# EAGLE board PAINEL (EAGLE 6.3), part 1 of 4
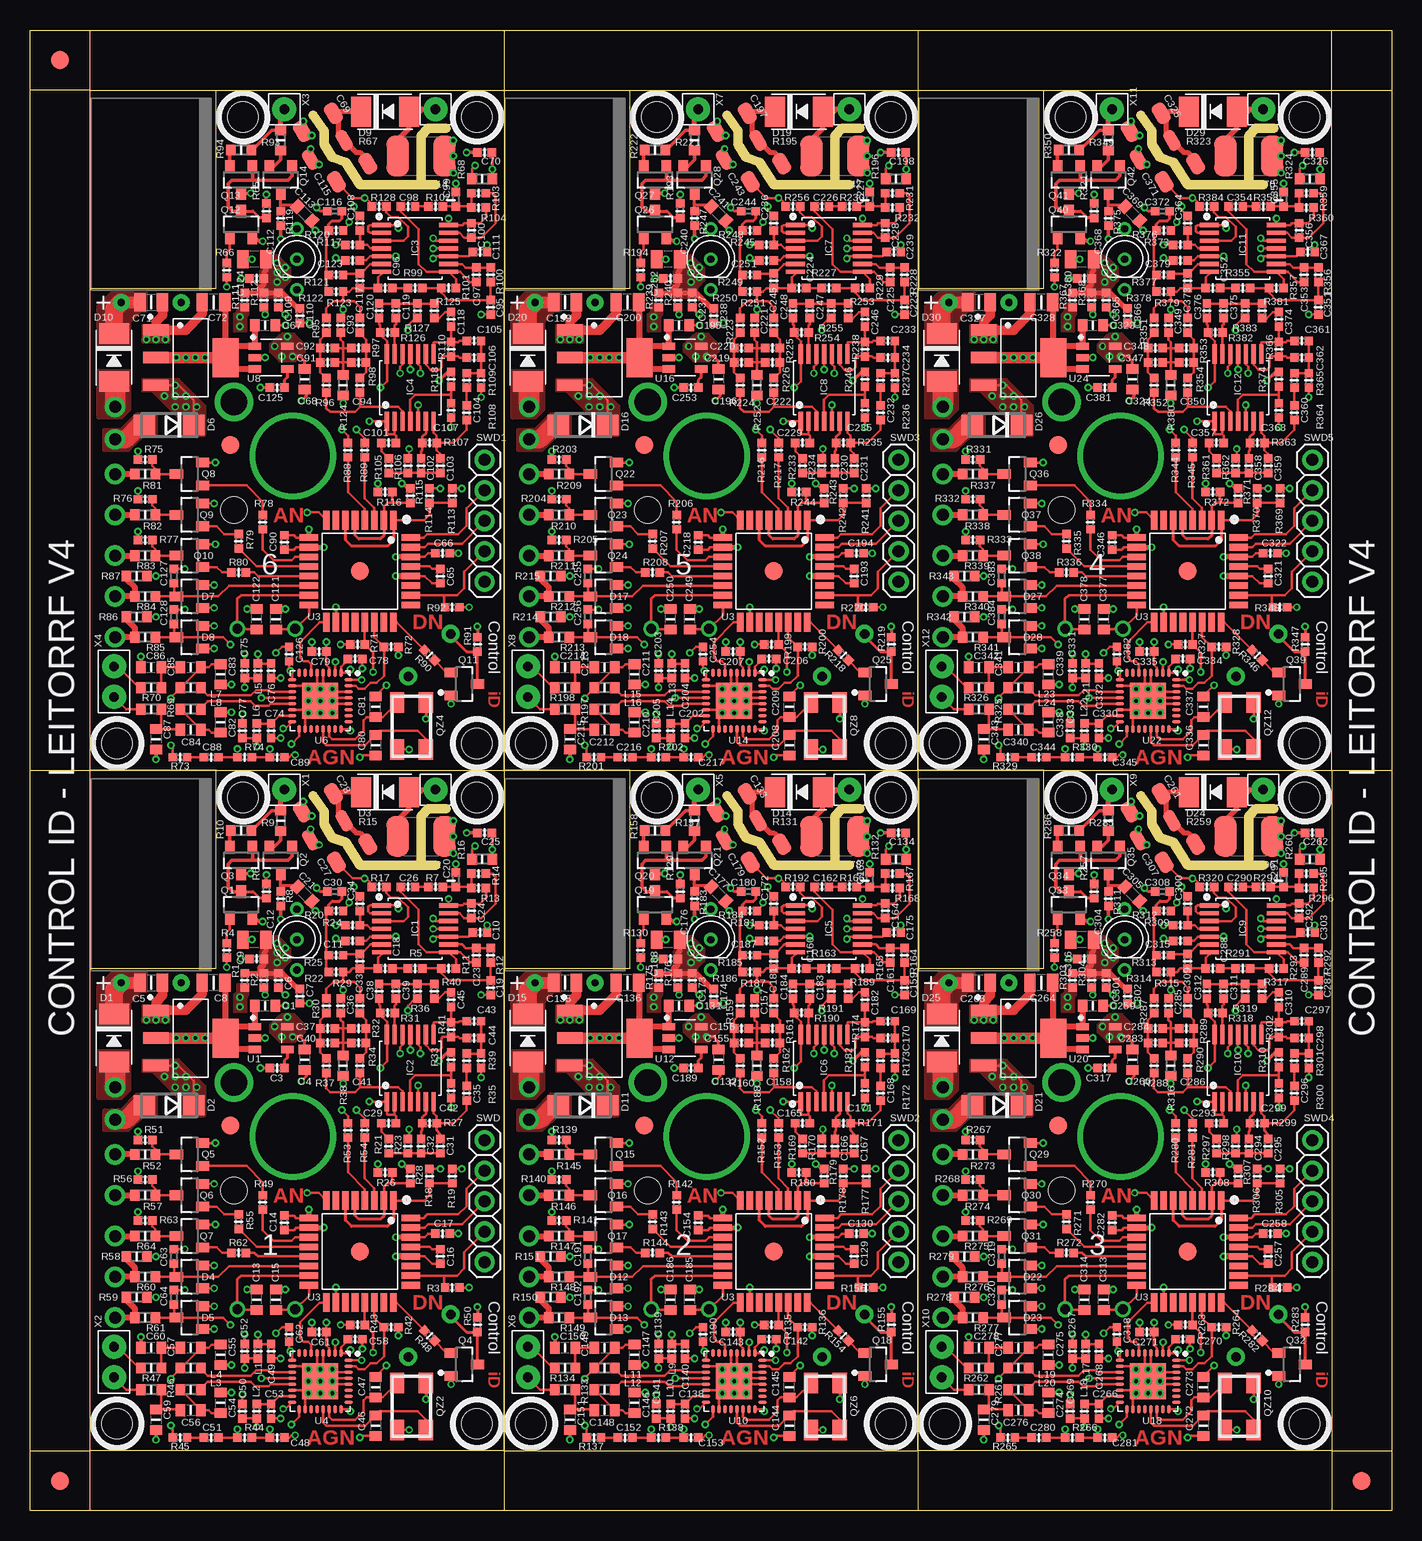
[diagram p0: board, top side]
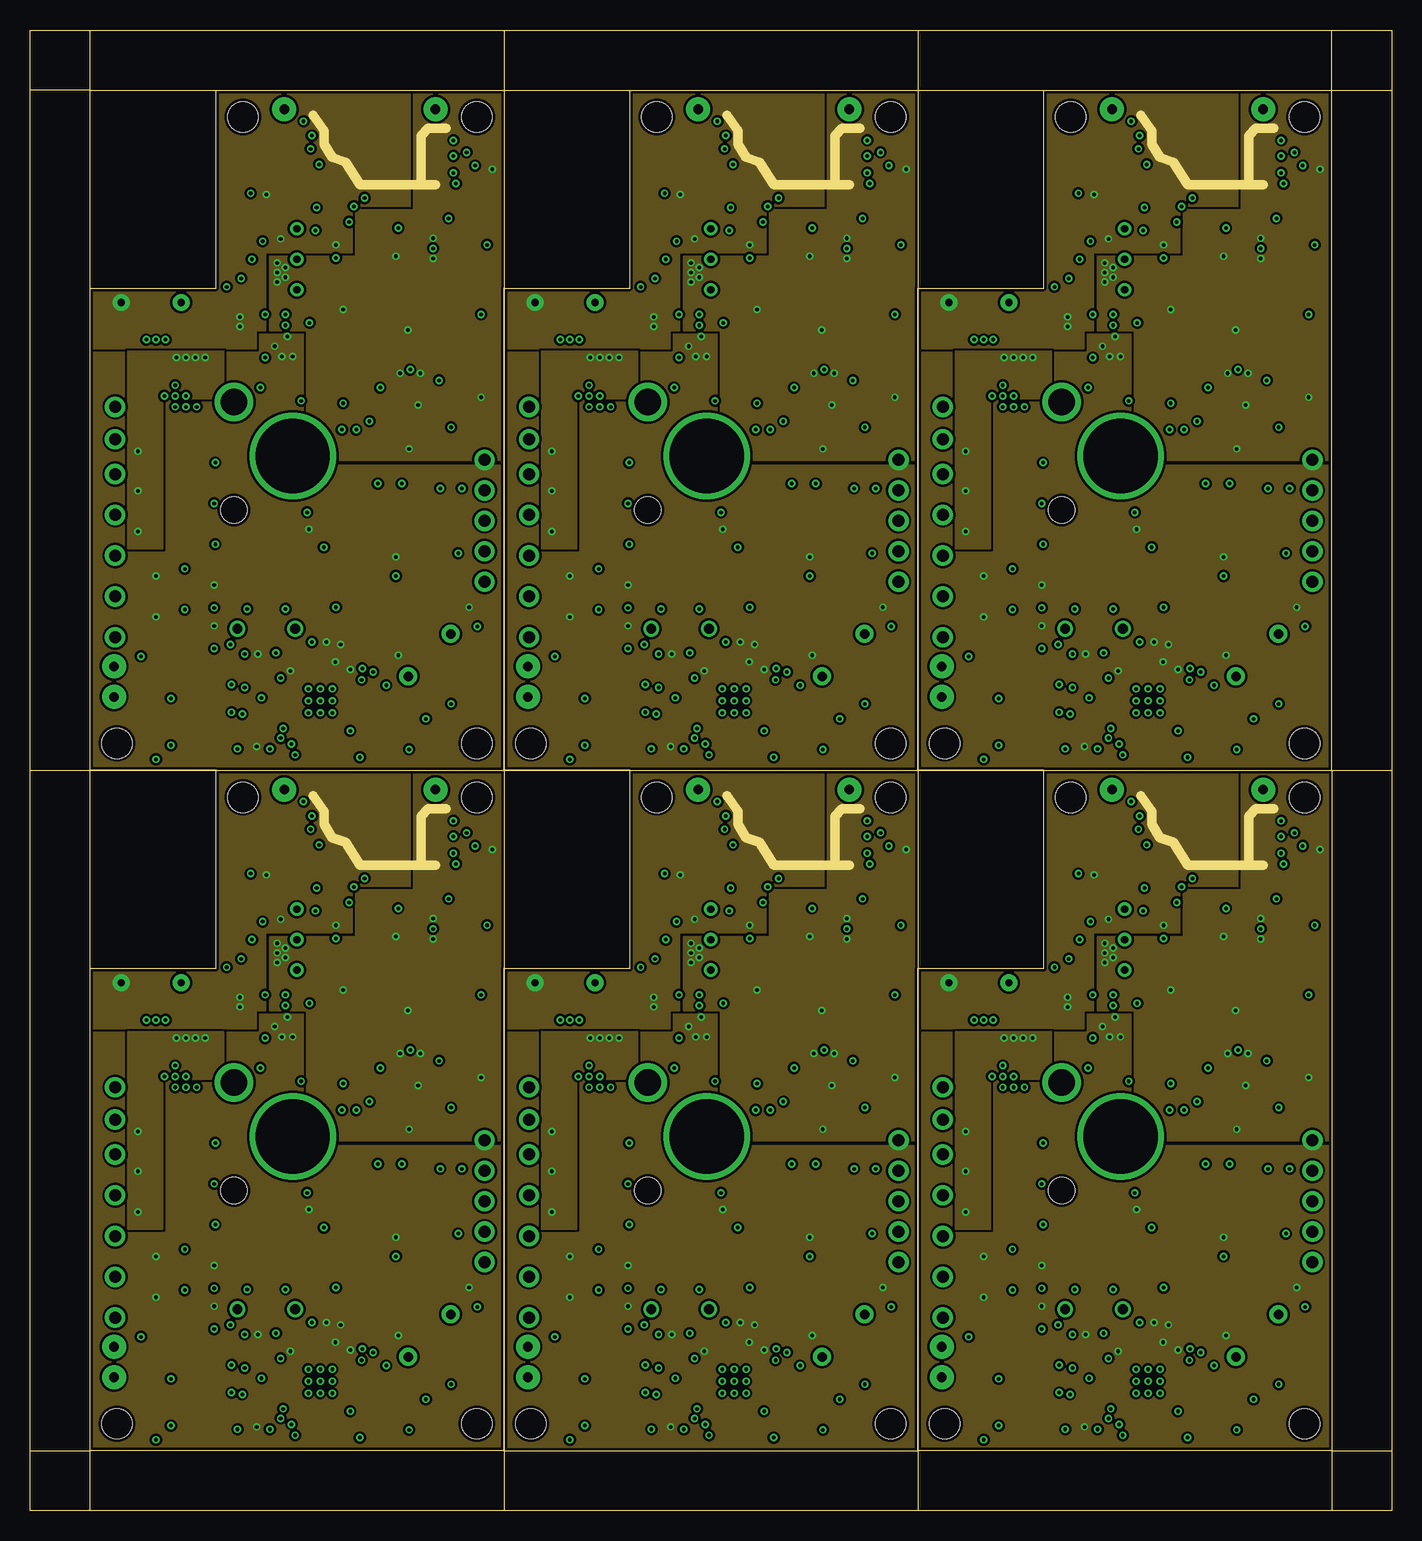
[diagram p1: board, inner layer Route4]
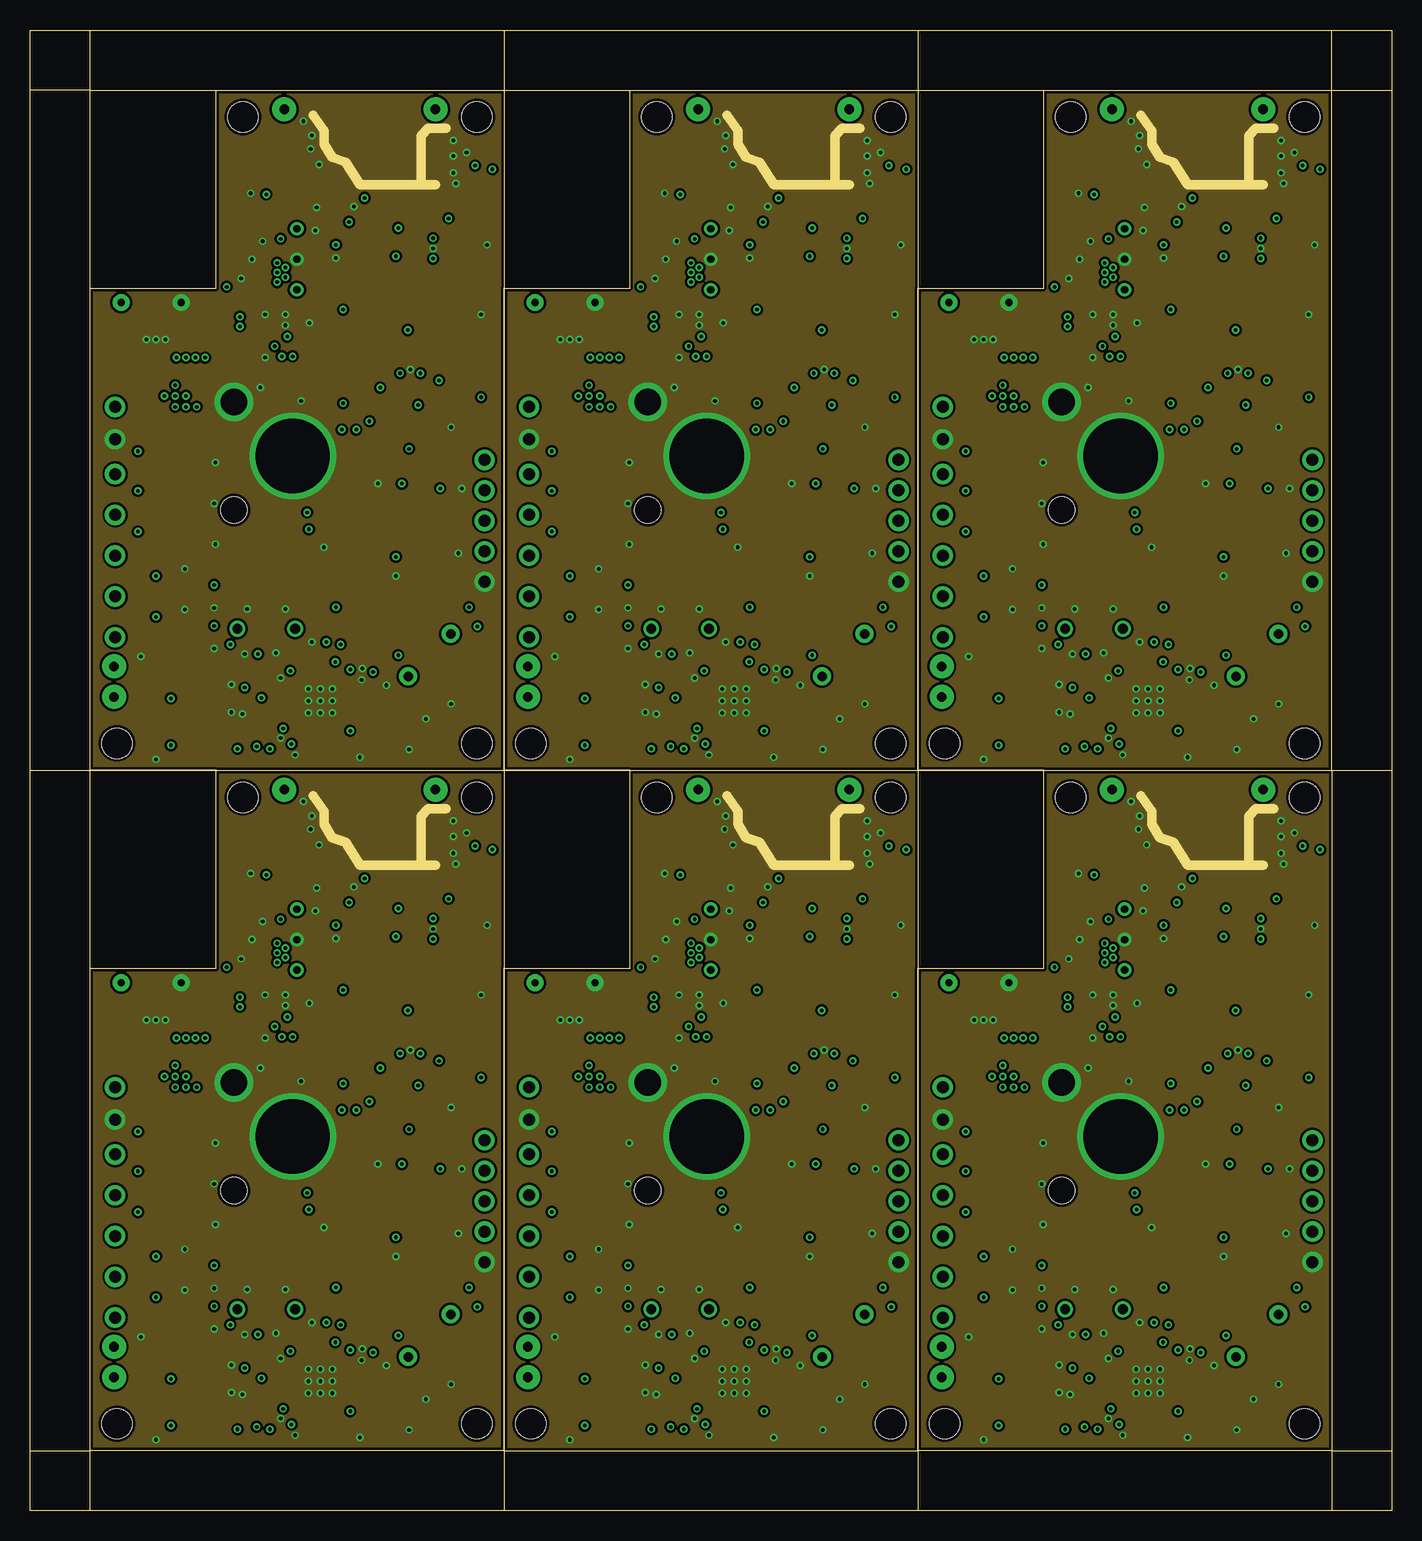
[diagram p2: board, inner layer Route5]
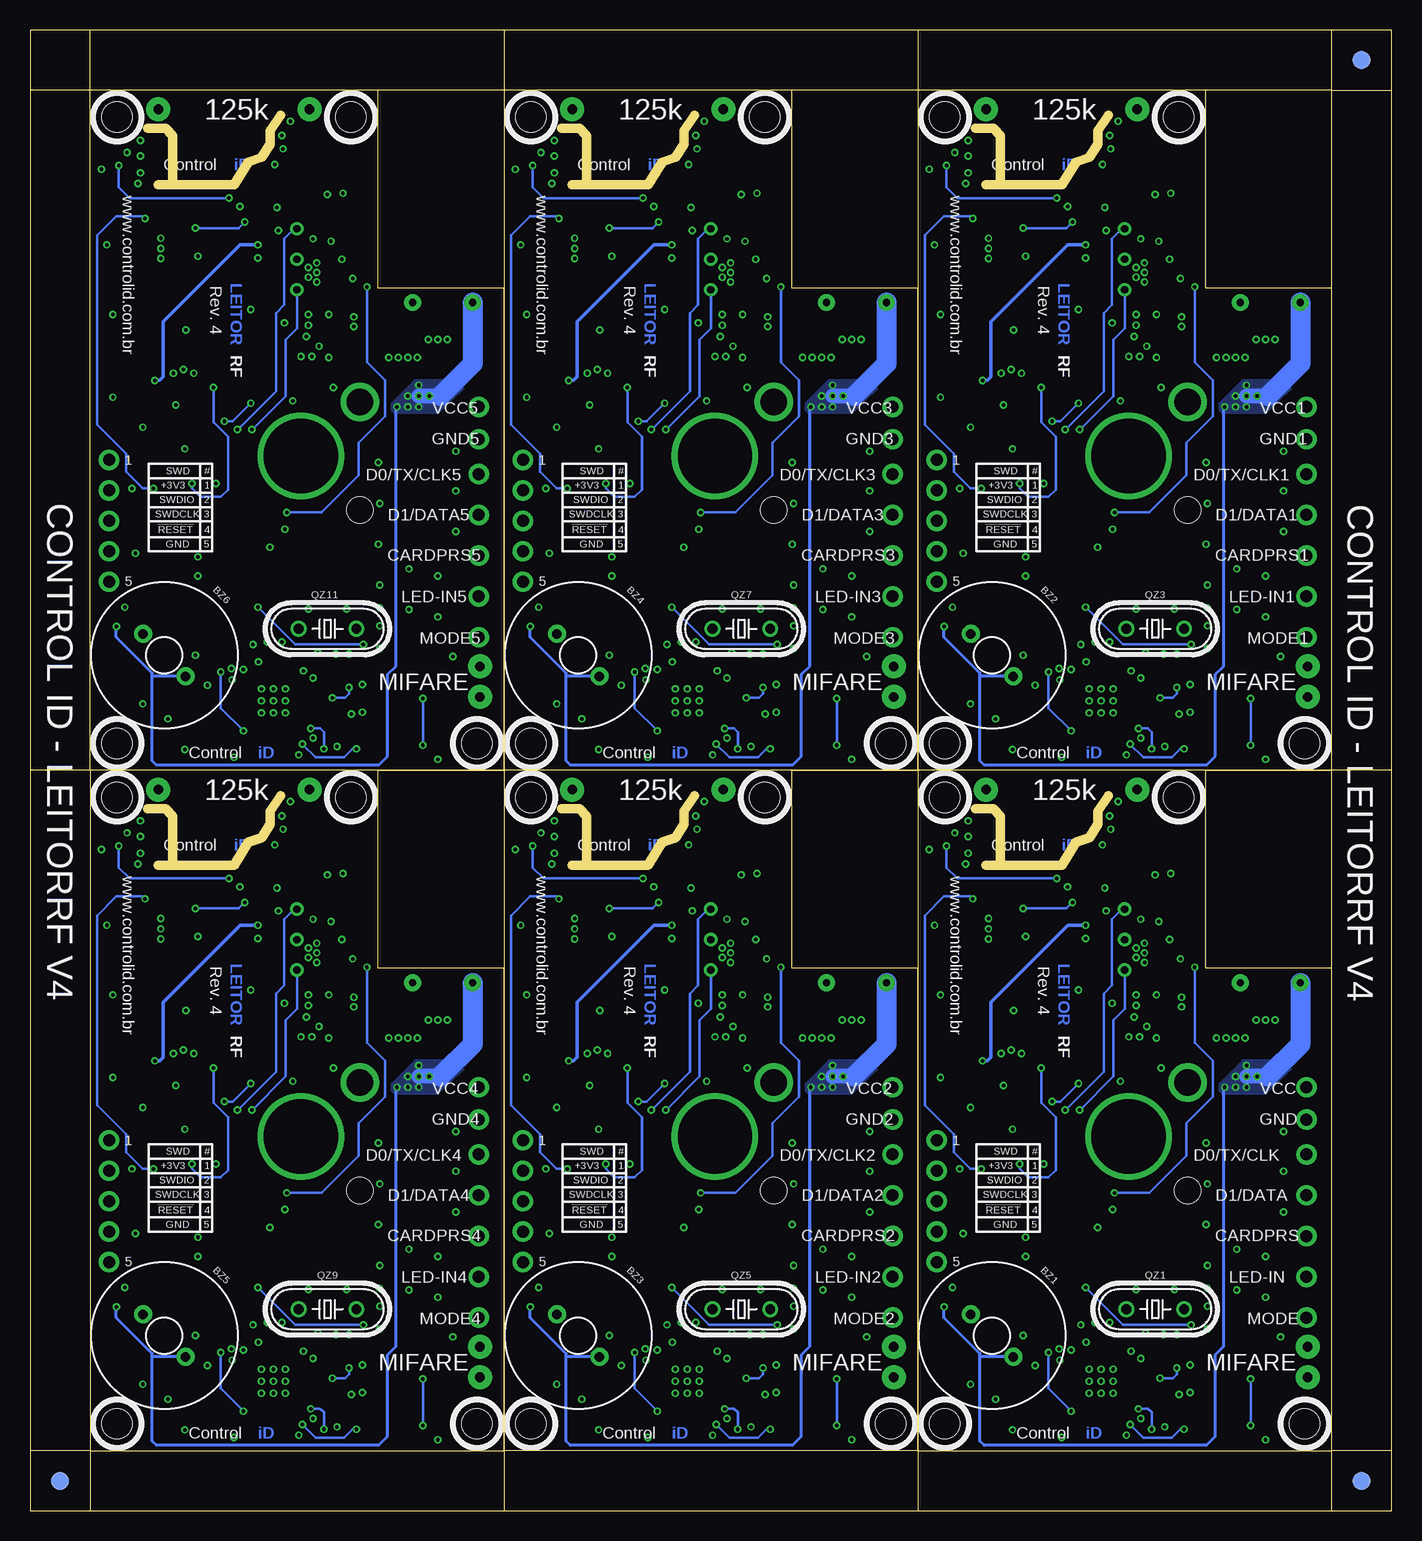
[diagram p3: board, bottom side, seen from below]

Size 113.5 x 123.4 mm. Coordinates in mm from the lower left corner, seen from the top.
Outline: 15.5,61.7 39.5,61.7
Outline: 39.5,61.7 39.5,45.2
Outline: 39.5,5 5,5
Outline: 5,5 5,45.2
Outline: 5,45.2 15.5,45.2 15.5,61.7
Outline: 39.5,101.9 39.5,118.4 15.5,118.4 15.5,101.9 5,101.9 5,61.7 15.5,61.7
Outline: 50,61.7 74,61.7
Outline: 74,61.7 74,45.2
Outline: 39.5,5 39.5,45.2
Outline: 39.5,45.2 50,45.2 50,61.7
Outline: 74,101.9 74,118.4 50,118.4 50,101.9 39.5,101.9
Outline: 50,61.7 39.5,61.7
Outline: 39.5,61.7 39.5,101.9
Outline: 84.5,61.7 108.5,61.7
Outline: 108.5,61.7 108.5,5
Outline: 108.5,5 74,5
Outline: 74,5 74,45.2
Outline: 74,45.2 84.5,45.2 84.5,61.7
Outline: 84.5,118.4 108.5,118.4
Outline: 84.5,61.7 74,61.7
Outline: 74,61.7 74,101.9
Outline: 74,101.9 84.5,101.9 84.5,118.4
Outline: 0,5 0,0 5,0
Outline: 0,5 0,61.7
Outline: 0,61.7 0,118.4
Outline: 0,118.4 0,123.4 5,123.4
Outline: 5,123.4 39.5,123.4
Outline: 39.5,123.4 74,123.4
Outline: 74,123.4 108.5,123.4
Outline: 108.5,123.4 113.5,123.4 113.5,118.4
Outline: 113.5,118.4 113.5,61.7
Outline: 113.5,61.7 113.5,5
Outline: 113.5,5 113.5,0 108.5,0
Outline: 108.5,0 74,0
Outline: 74,0 39.5,0
Outline: 39.5,0 5,0
Outline: 0,5 5,5
Outline: 5,0 5,5
Outline: 5,118.4 0,118.4
Outline: 5,118.4 5,123.4
Outline: 108.5,118.4 108.5,123.4
Outline: 108.5,118.4 113.5,118.4
Outline: 108.5,5 108.5,0
Outline: 108.5,5 113.5,5
Outline: 39.5,123.4 39.5,0
Outline: 74,123.4 74,0
Outline: 0,61.7 113.5,61.7
Outline: 5,45.2 5,118.4
Outline: 39.5,5 74,5
Outline: 108.5,61.7 108.5,118.4
Outline: 5,118.4 84.5,118.4
Copper layers (1+4*5+16): Top 0.035mm / dielectric 0.2mm / Route4 0.035mm / dielectric 1.1mm / Route5 0.035mm / dielectric 0.2mm / Bottom 0.035mm
Design rules "Leitor": minimum track width 8mil, minimum drill 0.3mm, track to track 8mil, track to pad 8mil, pad to pad 8mil, via to via 8mil, smd to smd 0mil, copper to edge 10mil, drill to drill 10mil, minimum pad ring 10mil, minimum via ring 6mil, stop-mask expansion 2mil, vias tented up to drill 100mil, thermal gap 10mil
Holes 2.2 mm at 17,26.7 17,83.4 51.5,26.7 51.5,83.4 86,26.7 86,83.4
Holes 2.5 mm at 7.25,7.25 37.25,7.25 17.75,59.45 37.25,59.45 7.25,63.95 37.25,63.95 17.75,116.15 37.25,116.15 41.75,7.25 71.75,7.25 52.25,59.45 71.75,59.45 41.75,63.95 71.75,63.95 52.25,116.15 71.75,116.15 76.25,7.25 106.25,7.25 86.75,59.45 106.25,59.45 76.25,63.95 106.25,63.95 86.75,116.15 106.25,116.15
bRestrict: area 22.9,58.9 to 23.2,61.5; area 34.9,37.2 to 39.4,37.4; area 22.9,115.6 to 23.2,118.2; area 34.9,93.9 to 39.4,94.1; area 57.4,58.9 to 57.7,61.5; area 69.4,37.2 to 73.9,37.4; area 57.4,115.6 to 57.7,118.2; area 69.4,93.9 to 73.9,94.1; area 91.9,58.9 to 92.2,61.5; area 103.9,37.2 to 108.4,37.4; area 91.9,115.6 to 92.2,118.2; area 103.9,93.9 to 108.4,94.1
Milling: 60 lines

## Footprints (pad centres in the part's own frame; a part is rotated, then mirrored left to right if it is on the bottom)
F/TMB = drill 0.8 pad 1.5: + 2.5,0; - -2.5,0
C0603 = smd 0.8 x 1: 1 -0.85,0; 2 0.85,0
ESK108M016AH2AA = drill 0.6 pad 1.4: + -2.5,0; - 2.5,0
C0402 = smd 0.7 x 0.7: 1 -0.6,0; 2 0.6,0
C0805 = smd 0.95 x 1.5: 1 -0.95,0; 2 0.95,0
C1812S = smd 1.9 x 3.4: 1 -1.95,0; 2 1.95,0
C1206S = smd 1.2 x 1.8: 1 -1.5,0; 2 1.5,0
HOLE = drill 1 pad 1.7: P$1 0,0
SMA = smd 1.7 x 2.5: A 2,0; K -2,0
DO214AC = smd 1.8 x 1.7: A 2.05,0; C -2.05,0
SOT23 = smd 0.8 x 1.1: 1 -0.95,-1.1; 2 0.95,-1.1; 3 0,1.1
FIDUCIAL-1.5X3 = smd 1.5 x 1.5: 1 0,0
TSSOP14 = smd 0.35 x 1.6: 1 -1.95,-2.8; 2 -1.3,-2.8; 3 -0.65,-2.8; 4 0,-2.8; 5 0.65,-2.8; 6 1.3,-2.8; 7 1.95,-2.8; 8 1.95,2.8; 9 1.3,2.8; 10 0.65,2.8; 11 0,2.8; 12 -0.65,2.8; 13 -1.3,2.8; 14 -1.95,2.8
R0402 = smd 0.7 x 0.7: 1 -0.6,0; 2 0.6,0
R0603 = smd 0.8 x 0.9: 1 -0.85,0; 2 0.85,0
LTL1BEKVJNN = drill 0.6: ANODE_GRN -2.54,0; ANODE_RED 2.54,0; COMMON 0,0
HC49/S = drill 0.813: 1 -2.413,0; 2 2.413,0
CRISTAL4SMD = smd 1.7 x 1.2: 1 -1.95,-1.2; 2 1.95,-1.2; 3 1.95,1.2; 4 -1.95,1.2
R1206S = smd 1 x 1.8: 1 -1.6,0; 2 1.6,0
1X05 = drill 1.016 pad 1.7: 1 -5.08,0; 2 -2.54,0; 3 0,0; 4 2.54,0; 5 5.08,0
SOT-23-5 = smd 0.6 x 1.05: 1 -0.95,-1.35; 2 0,-1.35; 3 0.95,-1.35; 4 0.95,1.35; 5 -0.95,1.35
SOT223-3L = smd 0.95 x 2.15: 1 -2.3,-2.9; 2 0,-2.9; 3 2.3,-2.9 | smd 3.25 x 2.15: 4 0,2.9
TQFP32 = smd 0.55 x 1.55: 1 -2.8,-4.25; 2 -2,-4.25; 3 -1.2,-4.25; 4 -0.4,-4.25; 5 0.4,-4.25; 6 1.2,-4.25; 7 2,-4.25; 8 2.8,-4.25; 17 2.8,4.25; 18 2,4.25; 19 1.2,4.25; 20 0.4,4.25; 21 -0.4,4.25; 22 -1.2,4.25; 23 -2,4.25; 24 -2.8,4.25 | smd 1.55 x 0.55: 9 4.25,-2.8; 10 4.25,-2; 11 4.25,-1.2; 12 4.25,-0.4; 13 4.25,0.4; 14 4.25,1.2; 15 4.25,2; 16 4.25,2.8; 25 -4.25,2.8; 26 -4.25,2; 27 -4.25,1.2; 28 -4.25,0.4; 29 -4.25,-0.4; 30 -4.25,-1.2; 31 -4.25,-2; 32 -4.25,-2.8
QFN32 = smd 0.69 x 0.28: 1 -2.35,1.75; 2 -2.35,1.25; 3 -2.35,0.75; 4 -2.35,0.25; 5 -2.35,-0.25; 6 -2.35,-0.75; 7 -2.35,-1.25; 8 -2.35,-1.75; 17 2.35,-1.75; 18 2.35,-1.25; 19 2.35,-0.75; 20 2.35,-0.25; 21 2.35,0.25; 22 2.35,0.75; 23 2.35,1.25; 24 2.35,1.75 | smd 0.28 x 0.69: 9 -1.75,-2.35; 10 -1.25,-2.35; 11 -0.75,-2.35; 12 -0.25,-2.35; 13 0.25,-2.35; 14 0.75,-2.35; 15 1.25,-2.35; 16 1.75,-2.35; 25 1.75,2.35; 26 1.25,2.35; 27 0.75,2.35; 28 0.25,2.35; 29 -0.25,2.35; 30 -0.75,2.35; 31 -1.25,2.35; 32 -1.75,2.35 | smd 3 x 3: 33 0,0
22-23-2021 = drill 0.8 pad 2: 1 -6.3,0; 2 6.3,0
ANTENNA = drill 0.8 pad 2: 1 -1.27,0; 2 1.27,0

## Placement (x,y rotation side)
BZ1  F/TMB  [F/TMB]  33.3,14.6 315 bottom
BZ2  F/TMB  [F/TMB]  33.3,71.3 315 bottom
BZ3  F/TMB  [F/TMB]  67.8,14.6 315 bottom
BZ4  F/TMB  [F/TMB]  67.8,71.3 315 bottom
BZ5  F/TMB  [F/TMB]  102.3,14.6 315 bottom
BZ6  F/TMB  [F/TMB]  102.3,71.3 315 bottom
C1  4.7u  [C0603]  19.6,42.1 0 top
C2  ESK108M016AH2AA  [ESK108M016AH2AA]  10.1,44 0 top
C3  10n  [C0402]  20.6,36.9 180 top
C4  4.7u  [C0603]  22.9,37.6 270 top
C5  10u  [C0805]  10.1,44 0 top
C6  0.1u  [C0402]  20.7,44.2 270 top
C7  10n  [C0402]  22.5,42.9 270 top
C8  10u  [C0805]  15.3,44 180 top
C9  0.1u  [C0402]  18.9,46 180 top
C10  0.1u  [C0402]  37.5,48.2 0 top
C11  0.1u  [C0402]  26.9,47.5 180 top
C12  10u  [C0805]  18.7,47.6 180 top
C13  18p  [C0603]  18.9,17.6 90 top
C14  0.1u  [C0402]  21.2,24 270 top
C15  18p  [C0603]  20.5,17.6 90 top
C16  0.1u  [C0402]  34.2,21.2 270 top
C17  0.1u  [C0402]  34.4,23.1 0 top
C18  220n  [C0402]  29.6,45.2 180 top
C19  4.7n  [C0402]  38.4,43.6 270 top
C20  4.7n  [C0402]  35.5,52.6 90 top
C21  DNP  [C0603]  22.9,51.4 315 top
C22  1n  [C1812S]  32.6,56.2 0 top
C23  68p  [C0402]  37.2,46.3 90 top
C24  68p  [C0402]  36.8,50 90 top
C25  0.1u  [C0402]  37.9,56.5 180 top
C26  220n  [C0402]  31.5,52 0 top
C27  220n  [C1206S]  26.85,54.8 210 top
C28  1n  [C1206S]  24,59 210 top
C29  F:0.1uP:10n  [C0402]  29.9,32.3 0 top
C30  680p  [C0402]  25.4,51.6 180 top
C31  F:220pP:68p  [C0402]  34.2,30.4 270 top
C32  F:1nP:100p  [C0402]  32.6,30.4 270 top
C33  68p  [C0402]  27.5,45.8 90 top
C34  0.1u  [C0402]  27.5,50.6 90 top
C35  F:0.1uP:10n  [C0402]  36.4,34.8 90 top
C36  47p  [C0402]  27.5,42.1 90 top
C37  47p  [C0402]  24.8,40.2 0 top
C38  F:220pP:68p  [C0402]  29.1,43.3 90 top
C39  F:1nP:100p  [C0402]  30.5,43.3 90 top
C40  47p  [C0402]  24.8,39 0 top
C41  47p  [C0402]  27.5,37.1 90 top
C42  0.1u  [C0402]  35.1,35 270 top
C43  F:220pP:68p  [C0402]  37,40.8 0 top
C44  F:1nP:100p  [C0402]  37,39.4 0 top
C45  F:0.1uP:10n  [C0402]  35.1,42.6 270 top
C46  18p  [C0603]  28.8,7.1 270 top
C47  18p  [C0603]  28.8,10.3 90 top
C48  0.1u  [C0402]  20.6,6.1 0 top
C49  100p  [C0402]  20.1,13.3 270 top
C50  100p  [C0402]  17.7,8.3 90 top
C51  1n  [C0402]  15.1,6.1 0 top
C52  0.1u  [C0402]  17.9,13.3 90 top
C53  0.1u  [C0402]  20.1,8.3 270 top
C54  120p  [C0603]  15.9,9 90 top
C55  120p  [C0603]  15.9,13 90 top
C56  18p  [C0603]  13.4,8.4 0 top
C57  18p  [C0603]  13.4,13.6 0 top
C58  0.1u  [C0402]  27.1,14.3 0 top
C59  56p  [C0603]  10.5,7.6 270 top
C60  56p  [C0603]  10.1,13.6 0 top
C61  0.1u  [C0402]  24.1,14.9 180 top
C62  0.1u  [C0402]  21.6,14.7 90 top
C63  0.1u  [C0402]  12,21.2 90 top
C64  0.1u  [C0402]  12,17.8 90 top
C65  0.1u  [C0402]  34.2,77.9 270 top
C66  0.1u  [C0402]  34.4,79.8 0 top
C67  4.7u  [C0603]  19.6,98.8 0 top
C68  4.7u  [C0603]  22.9,94.3 270 top
C69  1n  [C1206S]  24,115.7 210 top
C70  0.1u  [C0402]  37.9,113.2 180 top
C71  10u  [C0805]  10.1,100.7 0 top
C72  10u  [C0805]  15.3,100.7 180 top
C73  ESK108M016AH2AA  [ESK108M016AH2AA]  10.1,100.7 0 top
C74  0.1u  [C0402]  20.1,65 270 top
C75  0.1u  [C0402]  17.9,70 90 top
C76  100p  [C0402]  20.1,70 270 top
C77  100p  [C0402]  17.7,65 90 top
C78  0.1u  [C0402]  27.1,71 0 top
C79  0.1u  [C0402]  24.1,71.6 180 top
C80  18p  [C0603]  28.8,63.8 270 top
C81  18p  [C0603]  28.8,67 90 top
C82  120p  [C0603]  15.9,65.7 90 top
C83  120p  [C0603]  15.9,69.7 90 top
C84  18p  [C0603]  13.4,65.1 0 top
C85  18p  [C0603]  13.4,70.3 0 top
C86  56p  [C0603]  10.1,70.3 0 top
C87  56p  [C0603]  10.5,64.3 270 top
C88  1n  [C0402]  15.1,62.8 0 top
C89  0.1u  [C0402]  20.6,62.8 0 top
C90  0.1u  [C0402]  21.2,80.7 270 top
C91  47p  [C0402]  24.8,95.7 0 top
C92  47p  [C0402]  24.8,96.9 0 top
C93  47p  [C0402]  27.5,98.8 90 top
C94  47p  [C0402]  27.5,93.8 90 top
C95  4.7n  [C0402]  38.4,100.3 270 top
C96  220n  [C0402]  29.6,101.9 180 top
C97  68p  [C0402]  37.2,103 90 top
C98  220n  [C0402]  31.5,108.7 0 top
C99  4.7n  [C0402]  35.5,109.3 90 top
C100  68p  [C0402]  36.8,106.7 90 top
C101  F:0.1uP:10n  [C0402]  29.9,89 0 top
C102  F:1nP:100p  [C0402]  32.6,87.1 270 top
C103  F:220pP:68p  [C0402]  34.2,87.1 270 top
C104  F:0.1uP:10n  [C0402]  36.4,91.5 90 top
C105  F:220pP:68p  [C0402]  37,97.5 0 top
C106  F:1nP:100p  [C0402]  37,96.1 0 top
C107  0.1u  [C0402]  35.1,91.7 270 top
C108  0.1u  [C0402]  27.5,107.3 90 top
C109  0.1u  [C0402]  20.7,100.9 270 top
C110  10n  [C0402]  22.5,99.6 270 top
C111  0.1u  [C0402]  37.5,104.9 0 top
C112  10u  [C0805]  18.7,104.3 180 top
C113  DNP  [C0603]  22.9,108.1 315 top
C114  1n  [C1812S]  32.6,112.9 0 top
C115  220n  [C1206S]  26.85,111.5 210 top
C116  680p  [C0402]  25.4,108.3 180 top
C117  68p  [C0402]  27.5,102.5 90 top
C118  F:0.1uP:10n  [C0402]  35.1,99.3 270 top
C119  F:1nP:100p  [C0402]  30.5,100 90 top
C120  F:220pP:68p  [C0402]  29.1,100 90 top
C121  18p  [C0603]  20.5,74.3 90 top
C122  18p  [C0603]  18.9,74.3 90 top
C123  0.1u  [C0402]  26.9,104.2 180 top
C124  0.1u  [C0402]  18.9,102.7 180 top
C125  10n  [C0402]  20.6,93.6 180 top
C126  0.1u  [C0402]  21.6,71.4 90 top
C127  0.1u  [C0402]  12,77.9 90 top
C128  0.1u  [C0402]  12,74.5 90 top
C129  0.1u  [C0402]  68.7,21.2 270 top
C130  0.1u  [C0402]  68.9,23.1 0 top
C131  4.7u  [C0603]  54.1,42.1 0 top
C132  4.7u  [C0603]  57.4,37.6 270 top
C133  1n  [C1206S]  58.5,59 210 top
C134  0.1u  [C0402]  72.4,56.5 180 top
C135  10u  [C0805]  44.6,44 0 top
C136  10u  [C0805]  49.8,44 180 top
C137  ESK108M016AH2AA  [ESK108M016AH2AA]  44.6,44 0 top
C138  0.1u  [C0402]  54.6,8.3 270 top
C139  0.1u  [C0402]  52.4,13.3 90 top
C140  100p  [C0402]  54.6,13.3 270 top
C141  100p  [C0402]  52.2,8.3 90 top
C142  0.1u  [C0402]  61.6,14.3 0 top
C143  0.1u  [C0402]  58.6,14.9 180 top
C144  18p  [C0603]  63.3,7.1 270 top
C145  18p  [C0603]  63.3,10.3 90 top
C146  120p  [C0603]  50.4,9 90 top
C147  120p  [C0603]  50.4,13 90 top
C148  18p  [C0603]  47.9,8.4 0 top
C149  18p  [C0603]  47.9,13.6 0 top
C150  56p  [C0603]  44.6,13.6 0 top
C151  56p  [C0603]  45,7.6 270 top
C152  1n  [C0402]  49.6,6.1 0 top
C153  0.1u  [C0402]  55.1,6.1 0 top
C154  0.1u  [C0402]  55.7,24 270 top
C155  47p  [C0402]  59.3,39 0 top
C156  47p  [C0402]  59.3,40.2 0 top
C157  47p  [C0402]  62,42.1 90 top
C158  47p  [C0402]  62,37.1 90 top
C159  4.7n  [C0402]  72.9,43.6 270 top
C160  220n  [C0402]  64.1,45.2 180 top
C161  68p  [C0402]  71.7,46.3 90 top
C162  220n  [C0402]  66,52 0 top
C163  4.7n  [C0402]  70,52.6 90 top
C164  68p  [C0402]  71.3,50 90 top
C165  F:0.1uP:10n  [C0402]  64.4,32.3 0 top
C166  F:1nP:100p  [C0402]  67.1,30.4 270 top
C167  F:220pP:68p  [C0402]  68.7,30.4 270 top
C168  F:0.1uP:10n  [C0402]  70.9,34.8 90 top
C169  F:220pP:68p  [C0402]  71.5,40.8 0 top
C170  F:1nP:100p  [C0402]  71.5,39.4 0 top
C171  0.1u  [C0402]  69.6,35 270 top
C172  0.1u  [C0402]  62,50.6 90 top
C173  0.1u  [C0402]  55.2,44.2 270 top
C174  10n  [C0402]  57,42.9 270 top
C175  0.1u  [C0402]  72,48.2 0 top
C176  10u  [C0805]  53.2,47.6 180 top
C177  DNP  [C0603]  57.4,51.4 315 top
C178  1n  [C1812S]  67.1,56.2 0 top
C179  220n  [C1206S]  61.35,54.8 210 top
C180  680p  [C0402]  59.9,51.6 180 top
C181  68p  [C0402]  62,45.8 90 top
C182  F:0.1uP:10n  [C0402]  69.6,42.6 270 top
C183  F:1nP:100p  [C0402]  65,43.3 90 top
C184  F:220pP:68p  [C0402]  63.6,43.3 90 top
C185  18p  [C0603]  55,17.6 90 top
C186  18p  [C0603]  53.4,17.6 90 top
C187  0.1u  [C0402]  61.4,47.5 180 top
C188  0.1u  [C0402]  53.4,46 180 top
C189  10n  [C0402]  55.1,36.9 180 top
C190  0.1u  [C0402]  56.1,14.7 90 top
C191  0.1u  [C0402]  46.5,21.2 90 top
C192  0.1u  [C0402]  46.5,17.8 90 top
C193  0.1u  [C0402]  68.7,77.9 270 top
C194  0.1u  [C0402]  68.9,79.8 0 top
C195  4.7u  [C0603]  54.1,98.8 0 top
C196  4.7u  [C0603]  57.4,94.3 270 top
C197  1n  [C1206S]  58.5,115.7 210 top
C198  0.1u  [C0402]  72.4,113.2 180 top
C199  10u  [C0805]  44.6,100.7 0 top
C200  10u  [C0805]  49.8,100.7 180 top
C201  ESK108M016AH2AA  [ESK108M016AH2AA]  44.6,100.7 0 top
C202  0.1u  [C0402]  54.6,65 270 top
C203  0.1u  [C0402]  52.4,70 90 top
C204  100p  [C0402]  54.6,70 270 top
C205  100p  [C0402]  52.2,65 90 top
C206  0.1u  [C0402]  61.6,71 0 top
C207  0.1u  [C0402]  58.6,71.6 180 top
C208  18p  [C0603]  63.3,63.8 270 top
C209  18p  [C0603]  63.3,67 90 top
C210  120p  [C0603]  50.4,65.7 90 top
C211  120p  [C0603]  50.4,69.7 90 top
C212  18p  [C0603]  47.9,65.1 0 top
C213  18p  [C0603]  47.9,70.3 0 top
C214  56p  [C0603]  44.6,70.3 0 top
C215  56p  [C0603]  45,64.3 270 top
C216  1n  [C0402]  49.6,62.8 0 top
C217  0.1u  [C0402]  55.1,62.8 0 top
C218  0.1u  [C0402]  55.7,80.7 270 top
C219  47p  [C0402]  59.3,95.7 0 top
C220  47p  [C0402]  59.3,96.9 0 top
C221  47p  [C0402]  62,98.8 90 top
C222  47p  [C0402]  62,93.8 90 top
C223  4.7n  [C0402]  72.9,100.3 270 top
C224  220n  [C0402]  64.1,101.9 180 top
C225  68p  [C0402]  71.7,103 90 top
C226  220n  [C0402]  66,108.7 0 top
C227  4.7n  [C0402]  70,109.3 90 top
C228  68p  [C0402]  71.3,106.7 90 top
C229  F:0.1uP:10n  [C0402]  64.4,89 0 top
C230  F:1nP:100p  [C0402]  67.1,87.1 270 top
C231  F:220pP:68p  [C0402]  68.7,87.1 270 top
C232  F:0.1uP:10n  [C0402]  70.9,91.5 90 top
C233  F:220pP:68p  [C0402]  71.5,97.5 0 top
C234  F:1nP:100p  [C0402]  71.5,96.1 0 top
C235  0.1u  [C0402]  69.6,91.7 270 top
C236  0.1u  [C0402]  62,107.3 90 top
C237  0.1u  [C0402]  55.2,100.9 270 top
C238  10n  [C0402]  57,99.6 270 top
C239  0.1u  [C0402]  72,104.9 0 top
C240  10u  [C0805]  53.2,104.3 180 top
C241  DNP  [C0603]  57.4,108.1 315 top
C242  1n  [C1812S]  67.1,112.9 0 top
C243  220n  [C1206S]  61.35,111.5 210 top
C244  680p  [C0402]  59.9,108.3 180 top
C245  68p  [C0402]  62,102.5 90 top
C246  F:0.1uP:10n  [C0402]  69.6,99.3 270 top
C247  F:1nP:100p  [C0402]  65,100 90 top
C248  F:220pP:68p  [C0402]  63.6,100 90 top
C249  18p  [C0603]  55,74.3 90 top
C250  18p  [C0603]  53.4,74.3 90 top
C251  0.1u  [C0402]  61.4,104.2 180 top
C252  0.1u  [C0402]  53.4,102.7 180 top
C253  10n  [C0402]  55.1,93.6 180 top
C254  0.1u  [C0402]  56.1,71.4 90 top
C255  0.1u  [C0402]  46.5,77.9 90 top
C256  0.1u  [C0402]  46.5,74.5 90 top
C257  0.1u  [C0402]  103.2,21.2 270 top
C258  0.1u  [C0402]  103.4,23.1 0 top
C259  4.7u  [C0603]  88.6,42.1 0 top
C260  4.7u  [C0603]  91.9,37.6 270 top
C261  1n  [C1206S]  93,59 210 top
C262  0.1u  [C0402]  106.9,56.5 180 top
C263  10u  [C0805]  79.1,44 0 top
C264  10u  [C0805]  84.3,44 180 top
C265  ESK108M016AH2AA  [ESK108M016AH2AA]  79.1,44 0 top
C266  0.1u  [C0402]  89.1,8.3 270 top
C267  0.1u  [C0402]  86.9,13.3 90 top
C268  100p  [C0402]  89.1,13.3 270 top
C269  100p  [C0402]  86.7,8.3 90 top
C270  0.1u  [C0402]  96.1,14.3 0 top
C271  0.1u  [C0402]  93.1,14.9 180 top
C272  18p  [C0603]  97.8,7.1 270 top
C273  18p  [C0603]  97.8,10.3 90 top
C274  120p  [C0603]  84.9,9 90 top
C275  120p  [C0603]  84.9,13 90 top
C276  18p  [C0603]  82.4,8.4 0 top
C277  18p  [C0603]  82.4,13.6 0 top
C278  56p  [C0603]  79.1,13.6 0 top
C279  56p  [C0603]  79.5,7.6 270 top
C280  1n  [C0402]  84.1,6.1 0 top
C281  0.1u  [C0402]  89.6,6.1 0 top
C282  0.1u  [C0402]  90.2,24 270 top
C283  47p  [C0402]  93.8,39 0 top
C284  47p  [C0402]  93.8,40.2 0 top
C285  47p  [C0402]  96.5,42.1 90 top
C286  47p  [C0402]  96.5,37.1 90 top
C287  4.7n  [C0402]  107.4,43.6 270 top
C288  220n  [C0402]  98.6,45.2 180 top
C289  68p  [C0402]  106.2,46.3 90 top
C290  220n  [C0402]  100.5,52 0 top
C291  4.7n  [C0402]  104.5,52.6 90 top
C292  68p  [C0402]  105.8,50 90 top
C293  F:0.1uP:10n  [C0402]  98.9,32.3 0 top
C294  F:1nP:100p  [C0402]  101.6,30.4 270 top
C295  F:220pP:68p  [C0402]  103.2,30.4 270 top
C296  F:0.1uP:10n  [C0402]  105.4,34.8 90 top
C297  F:220pP:68p  [C0402]  106,40.8 0 top
C298  F:1nP:100p  [C0402]  106,39.4 0 top
C299  0.1u  [C0402]  104.1,35 270 top
C300  0.1u  [C0402]  96.5,50.6 90 top
C301  0.1u  [C0402]  89.7,44.2 270 top
C302  10n  [C0402]  91.5,42.9 270 top
C303  0.1u  [C0402]  106.5,48.2 0 top
C304  10u  [C0805]  87.7,47.6 180 top
C305  DNP  [C0603]  91.9,51.4 315 top
C306  1n  [C1812S]  101.6,56.2 0 top
C307  220n  [C1206S]  95.85,54.8 210 top
C308  680p  [C0402]  94.4,51.6 180 top
C309  68p  [C0402]  96.5,45.8 90 top
C310  F:0.1uP:10n  [C0402]  104.1,42.6 270 top
C311  F:1nP:100p  [C0402]  99.5,43.3 90 top
C312  F:220pP:68p  [C0402]  98.1,43.3 90 top
C313  18p  [C0603]  89.5,17.6 90 top
C314  18p  [C0603]  87.9,17.6 90 top
C315  0.1u  [C0402]  95.9,47.5 180 top
C316  0.1u  [C0402]  87.9,46 180 top
C317  10n  [C0402]  89.6,36.9 180 top
C318  0.1u  [C0402]  90.6,14.7 90 top
C319  0.1u  [C0402]  81,21.2 90 top
C320  0.1u  [C0402]  81,17.8 90 top
C321  0.1u  [C0402]  103.2,77.9 270 top
C322  0.1u  [C0402]  103.4,79.8 0 top
C323  4.7u  [C0603]  88.6,98.8 0 top
C324  4.7u  [C0603]  91.9,94.3 270 top
C325  1n  [C1206S]  93,115.7 210 top
C326  0.1u  [C0402]  106.9,113.2 180 top
C327  10u  [C0805]  79.1,100.7 0 top
C328  10u  [C0805]  84.3,100.7 180 top
C329  ESK108M016AH2AA  [ESK108M016AH2AA]  79.1,100.7 0 top
C330  0.1u  [C0402]  89.1,65 270 top
C331  0.1u  [C0402]  86.9,70 90 top
C332  100p  [C0402]  89.1,70 270 top
C333  100p  [C0402]  86.7,65 90 top
C334  0.1u  [C0402]  96.1,71 0 top
C335  0.1u  [C0402]  93.1,71.6 180 top
C336  18p  [C0603]  97.8,63.8 270 top
C337  18p  [C0603]  97.8,67 90 top
C338  120p  [C0603]  84.9,65.7 90 top
C339  120p  [C0603]  84.9,69.7 90 top
C340  18p  [C0603]  82.4,65.1 0 top
C341  18p  [C0603]  82.4,70.3 0 top
C342  56p  [C0603]  79.1,70.3 0 top
C343  56p  [C0603]  79.5,64.3 270 top
C344  1n  [C0402]  84.1,62.8 0 top
C345  0.1u  [C0402]  89.6,62.8 0 top
C346  0.1u  [C0402]  90.2,80.7 270 top
C347  47p  [C0402]  93.8,95.7 0 top
C348  47p  [C0402]  93.8,96.9 0 top
C349  47p  [C0402]  96.5,98.8 90 top
C350  47p  [C0402]  96.5,93.8 90 top
C351  4.7n  [C0402]  107.4,100.3 270 top
C352  220n  [C0402]  98.6,101.9 180 top
C353  68p  [C0402]  106.2,103 90 top
C354  220n  [C0402]  100.5,108.7 0 top
C355  4.7n  [C0402]  104.5,109.3 90 top
C356  68p  [C0402]  105.8,106.7 90 top
C357  F:0.1uP:10n  [C0402]  98.9,89 0 top
C358  F:1nP:100p  [C0402]  101.6,87.1 270 top
C359  F:220pP:68p  [C0402]  103.2,87.1 270 top
C360  F:0.1uP:10n  [C0402]  105.4,91.5 90 top
C361  F:220pP:68p  [C0402]  106,97.5 0 top
C362  F:1nP:100p  [C0402]  106,96.1 0 top
C363  0.1u  [C0402]  104.1,91.7 270 top
C364  0.1u  [C0402]  96.5,107.3 90 top
C365  0.1u  [C0402]  89.7,100.9 270 top
C366  10n  [C0402]  91.5,99.6 270 top
C367  0.1u  [C0402]  106.5,104.9 0 top
C368  10u  [C0805]  87.7,104.3 180 top
C369  DNP  [C0603]  91.9,108.1 315 top
C370  1n  [C1812S]  101.6,112.9 0 top
C371  220n  [C1206S]  95.85,111.5 210 top
C372  680p  [C0402]  94.4,108.3 180 top
C373  68p  [C0402]  96.5,102.5 90 top
C374  F:0.1uP:10n  [C0402]  104.1,99.3 270 top
C375  F:1nP:100p  [C0402]  99.5,100 90 top
C376  F:220pP:68p  [C0402]  98.1,100 90 top
C377  18p  [C0603]  89.5,74.3 90 top
C378  18p  [C0603]  87.9,74.3 90 top
C379  0.1u  [C0402]  95.9,104.2 180 top
C380  0.1u  [C0402]  87.9,102.7 180 top
C381  10n  [C0402]  89.6,93.6 180 top
C382  0.1u  [C0402]  90.6,71.4 90 top
C383  0.1u  [C0402]  81,77.9 90 top
C384  0.1u  [C0402]  81,74.5 90 top
CARDPRS  CARD-PRES  [HOLE]  7.1,22.9 0 top
CARDPRS1  CARD-PRES  [HOLE]  7.1,79.6 0 top
CARDPRS2  CARD-PRES  [HOLE]  41.6,22.9 0 top
CARDPRS3  CARD-PRES  [HOLE]  41.6,79.6 0 top
CARDPRS4  CARD-PRES  [HOLE]  76.1,22.9 0 top
CARDPRS5  CARD-PRES  [HOLE]  76.1,79.6 0 top
D0/TX/CLK  D0/CLK/TX  [HOLE]  7.1,29.7 0 top
D0/TX/CLK1  D0/CLK/TX  [HOLE]  7.1,86.4 0 top
D0/TX/CLK2  D0/CLK/TX  [HOLE]  41.6,29.7 0 top
D0/TX/CLK3  D0/CLK/TX  [HOLE]  41.6,86.4 0 top
D0/TX/CLK4  D0/CLK/TX  [HOLE]  76.1,29.7 0 top
D0/TX/CLK5  D0/CLK/TX  [HOLE]  76.1,86.4 0 top
D1  BYG20J  [SMA]  7,39.4 270 top
D1/DATA  D1/DATA  [HOLE]  7.1,26.3 0 top
D1/DATA1  D1/DATA  [HOLE]  7.1,83 0 top
D1/DATA2  D1/DATA  [HOLE]  41.6,26.3 0 top
D1/DATA3  D1/DATA  [HOLE]  41.6,83 0 top
D1/DATA4  D1/DATA  [HOLE]  76.1,26.3 0 top
D1/DATA5  D1/DATA  [HOLE]  76.1,83 0 top
D2  [DO214AC]  11.6,33.8 180 top
D3  BYG20J  [SMA]  29.6,59.9 0 top
D4  BAT54S  [SOT23]  13.3,19.5 90 top
D5  BAT54S  [SOT23]  13.3,16.1 90 top
D6  [DO214AC]  11.6,90.5 180 top
D7  BAT54S  [SOT23]  13.3,76.2 90 top
D8  BAT54S  [SOT23]  13.3,72.8 90 top
D9  BYG20J  [SMA]  29.6,116.6 0 top
D10  BYG20J  [SMA]  7,96.1 270 top
D11  [DO214AC]  46.1,33.8 180 top
D12  BAT54S  [SOT23]  47.8,19.5 90 top
D13  BAT54S  [SOT23]  47.8,16.1 90 top
D14  BYG20J  [SMA]  64.1,59.9 0 top
D15  BYG20J  [SMA]  41.5,39.4 270 top
D16  [DO214AC]  46.1,90.5 180 top
D17  BAT54S  [SOT23]  47.8,76.2 90 top
D18  BAT54S  [SOT23]  47.8,72.8 90 top
D19  BYG20J  [SMA]  64.1,116.6 0 top
D20  BYG20J  [SMA]  41.5,96.1 270 top
D21  [DO214AC]  80.6,33.8 180 top
D22  BAT54S  [SOT23]  82.3,19.5 90 top
D23  BAT54S  [SOT23]  82.3,16.1 90 top
D24  BYG20J  [SMA]  98.6,59.9 0 top
D25  BYG20J  [SMA]  76,39.4 270 top
D26  [DO214AC]  80.6,90.5 180 top
D27  BAT54S  [SOT23]  82.3,76.2 90 top
D28  BAT54S  [SOT23]  82.3,72.8 90 top
D29  BYG20J  [SMA]  98.6,116.6 0 top
D30  BYG20J  [SMA]  76,96.1 270 top
FID1  FIDUCIAL1.5X3  [FIDUCIAL-1.5X3]  16.7,32.1 0 top
FID2  FIDUCIAL1.5X3  [FIDUCIAL-1.5X3]  16.7,88.8 0 top
FID3  FIDUCIAL1.5X3  [FIDUCIAL-1.5X3]  27.5,21.6 0 top
FID4  FIDUCIAL1.5X3  [FIDUCIAL-1.5X3]  27.5,78.3 0 top
FID5  FIDUCIAL1.5X3  [FIDUCIAL-1.5X3]  51.2,32.1 0 top
FID6  FIDUCIAL1.5X3  [FIDUCIAL-1.5X3]  62,21.6 0 top
FID7  FIDUCIAL1.5X3  [FIDUCIAL-1.5X3]  51.2,88.8 0 top
FID8  FIDUCIAL1.5X3  [FIDUCIAL-1.5X3]  62,78.3 0 top
FID9  FIDUCIAL1.5X3  [FIDUCIAL-1.5X3]  85.7,32.1 0 top
FID10  FIDUCIAL1.5X3  [FIDUCIAL-1.5X3]  96.5,21.6 0 top
FID11  FIDUCIAL1.5X3  [FIDUCIAL-1.5X3]  85.7,88.8 0 top
FID12  FIDUCIAL1.5X3  [FIDUCIAL-1.5X3]  96.5,78.3 0 top
GND  GND  [HOLE]  7.1,32.6 0 top
GND1  GND  [HOLE]  7.1,89.3 0 top
GND2  GND  [HOLE]  41.6,32.6 0 top
GND3  GND  [HOLE]  41.6,89.3 0 top
GND4  GND  [HOLE]  76.1,32.6 0 top
GND5  GND  [HOLE]  76.1,89.3 0 top
IC1  TL084  [TSSOP14]  32.1,48.5 270 top
IC2  TL084  [TSSOP14]  31.7,36.9 0 top
IC3  TL084  [TSSOP14]  32.1,105.2 270 top
IC4  TL084  [TSSOP14]  31.7,93.6 0 top
IC5  TL084  [TSSOP14]  66.6,48.5 270 top
IC6  TL084  [TSSOP14]  66.2,36.9 0 top
IC7  TL084  [TSSOP14]  66.6,105.2 270 top
IC8  TL084  [TSSOP14]  66.2,93.6 0 top
IC9  TL084  [TSSOP14]  101.1,48.5 270 top
IC10  TL084  [TSSOP14]  100.7,36.9 0 top
IC11  TL084  [TSSOP14]  101.1,105.2 270 top
IC12  TL084  [TSSOP14]  100.7,93.6 0 top
JP1  FIDUCIAL1.5X3  [FIDUCIAL-1.5X3]  2.5,2.5 0 bottom
JP2  FIDUCIAL1.5X3  [FIDUCIAL-1.5X3]  2.5,2.5 0 top
JP3  FIDUCIAL1.5X3  [FIDUCIAL-1.5X3]  2.5,120.9 0 bottom
JP4  FIDUCIAL1.5X3  [FIDUCIAL-1.5X3]  2.5,120.9 0 top
JP5  FIDUCIAL1.5X3  [FIDUCIAL-1.5X3]  111,2.5 0 bottom
JP6  FIDUCIAL1.5X3  [FIDUCIAL-1.5X3]  111,2.5 0 top
L1  22n  [R0402]  19,13.3 270 top
L2  22n  [R0402]  18.9,8.3 90 top
L3  1u  [R0603]  13.4,10.1 180 top
L4  1u  [R0603]  13.4,11.9 180 top
L5  22n  [R0402]  19,70 270 top
L6  22n  [R0402]  18.9,65 90 top
L7  1u  [R0603]  13.4,68.6 180 top
L8  1u  [R0603]  13.4,66.8 180 top
L9  22n  [R0402]  53.5,13.3 270 top
L10  22n  [R0402]  53.4,8.3 90 top
L11  1u  [R0603]  47.9,11.9 180 top
L12  1u  [R0603]  47.9,10.1 180 top
L13  22n  [R0402]  53.5,70 270 top
L14  22n  [R0402]  53.4,65 90 top
L15  1u  [R0603]  47.9,68.6 180 top
L16  1u  [R0603]  47.9,66.8 180 top
L17  22n  [R0402]  88,13.3 270 top
L18  22n  [R0402]  87.9,8.3 90 top
L19  1u  [R0603]  82.4,11.9 180 top
L20  1u  [R0603]  82.4,10.1 180 top
L21  22n  [R0402]  88,70 270 top
L22  22n  [R0402]  87.9,65 90 top
L23  1u  [R0603]  82.4,68.6 180 top
L24  1u  [R0603]  82.4,66.8 180 top
LED1  LTL1BEKVJNN  [LTL1BEKVJNN]  22.25,47.6 270 top
LED2  LTL1BEKVJNN  [LTL1BEKVJNN]  22.25,104.3 270 top
LED3  LTL1BEKVJNN  [LTL1BEKVJNN]  56.75,47.6 270 top
LED4  LTL1BEKVJNN  [LTL1BEKVJNN]  56.75,104.3 270 top
LED5  LTL1BEKVJNN  [LTL1BEKVJNN]  91.25,47.6 270 top
LED6  LTL1BEKVJNN  [LTL1BEKVJNN]  91.25,104.3 270 top
LED-IN  LED  [HOLE]  7.1,19.5 0 top
LED-IN1  LED  [HOLE]  7.1,76.2 0 top
LED-IN2  LED  [HOLE]  41.6,19.5 0 top
LED-IN3  LED  [HOLE]  41.6,76.2 0 top
LED-IN4  LED  [HOLE]  76.1,19.5 0 top
LED-IN5  LED  [HOLE]  76.1,76.2 0 top
MODE  MODESELECT  [HOLE]  7.1,16.1 0 top
MODE1  MODESELECT  [HOLE]  7.1,72.8 0 top
MODE2  MODESELECT  [HOLE]  41.6,16.1 0 top
MODE3  MODESELECT  [HOLE]  41.6,72.8 0 top
MODE4  MODESELECT  [HOLE]  76.1,16.1 0 top
MODE5  MODESELECT  [HOLE]  76.1,72.8 0 top
Q1  DMN3404  [SOT23]  17.6,50.5 0 top
Q2  MMBT4401  [SOT23]  20.9,54.2 180 top
Q3  MMBT4403  [SOT23]  17.6,54.2 180 top
Q4  MMBT4401  [SOT23]  36.2,12.2 270 top
Q5  MMBT4401  [SOT23]  13.3,29.7 90 top
Q6  MMBT4401  [SOT23]  13.3,26.3 90 top
Q7  MMBT4401  [SOT23]  13.3,22.9 90 top
Q8  MMBT4401  [SOT23]  13.3,86.4 90 top
Q9  MMBT4401  [SOT23]  13.3,83 90 top
Q10  MMBT4401  [SOT23]  13.3,79.6 90 top
Q11  MMBT4401  [SOT23]  36.2,68.9 270 top
Q12  DMN3404  [SOT23]  17.6,107.2 0 top
Q13  MMBT4403  [SOT23]  17.6,110.9 180 top
Q14  MMBT4401  [SOT23]  20.9,110.9 180 top
Q15  MMBT4401  [SOT23]  47.8,29.7 90 top
Q16  MMBT4401  [SOT23]  47.8,26.3 90 top
Q17  MMBT4401  [SOT23]  47.8,22.9 90 top
Q18  MMBT4401  [SOT23]  70.7,12.2 270 top
Q19  DMN3404  [SOT23]  52.1,50.5 0 top
Q20  MMBT4403  [SOT23]  52.1,54.2 180 top
Q21  MMBT4401  [SOT23]  55.4,54.2 180 top
Q22  MMBT4401  [SOT23]  47.8,86.4 90 top
Q23  MMBT4401  [SOT23]  47.8,83 90 top
Q24  MMBT4401  [SOT23]  47.8,79.6 90 top
Q25  MMBT4401  [SOT23]  70.7,68.9 270 top
Q26  DMN3404  [SOT23]  52.1,107.2 0 top
Q27  MMBT4403  [SOT23]  52.1,110.9 180 top
Q28  MMBT4401  [SOT23]  55.4,110.9 180 top
Q29  MMBT4401  [SOT23]  82.3,29.7 90 top
Q30  MMBT4401  [SOT23]  82.3,26.3 90 top
Q31  MMBT4401  [SOT23]  82.3,22.9 90 top
Q32  MMBT4401  [SOT23]  105.2,12.2 270 top
Q33  DMN3404  [SOT23]  86.6,50.5 0 top
Q34  MMBT4403  [SOT23]  86.6,54.2 180 top
Q35  MMBT4401  [SOT23]  89.9,54.2 180 top
Q36  MMBT4401  [SOT23]  82.3,86.4 90 top
Q37  MMBT4401  [SOT23]  82.3,83 90 top
Q38  MMBT4401  [SOT23]  82.3,79.6 90 top
Q39  MMBT4401  [SOT23]  105.2,68.9 270 top
Q40  DMN3404  [SOT23]  86.6,107.2 0 top
Q41  MMBT4403  [SOT23]  86.6,110.9 180 top
Q42  MMBT4401  [SOT23]  89.9,110.9 180 top
QZ1  8MHz  [HC49/S]  19.7,16.8 180 bottom
QZ2  27.12MHz  [CRISTAL4SMD]  31.8,8.7 270 top
QZ3  8MHz  [HC49/S]  19.7,73.5 180 bottom
QZ4  27.12MHz  [CRISTAL4SMD]  31.8,65.4 270 top
QZ5  8MHz  [HC49/S]  54.2,16.8 180 bottom
QZ6  27.12MHz  [CRISTAL4SMD]  66.3,8.7 270 top
QZ7  8MHz  [HC49/S]  54.2,73.5 180 bottom
QZ8  27.12MHz  [CRISTAL4SMD]  66.3,65.4 270 top
QZ9  8MHz  [HC49/S]  88.7,16.8 180 bottom
QZ10  27.12MHz  [CRISTAL4SMD]  100.8,8.7 270 top
QZ11  8MHz  [HC49/S]  88.7,73.5 180 bottom
QZ12  27.12MHz  [CRISTAL4SMD]  100.8,65.4 270 top
R1  470  [R0402]  17.9,44.2 90 top
R2  470  [R0402]  19.5,44.2 90 top
R3  12k  [R0402]  35.2,18.6 0 top
R4  1k  [R0402]  16.4,46.7 90 top
R5  4.7k  [R0402]  32.1,45.2 180 top
R6  2.2k  [R0402]  19.7,51.65 90 top
R7  4.7k  [R0402]  33.8,52 0 top
R8  0  [R0402]  20.9,51 270 top
R9  10  [R0603]  20.9,57.5 270 top
R10  10  [R0603]  17.6,56.7 0 top
R11  91k  [R0402]  34.9,45.2 180 top
R12  13k  [R0402]  38.4,46.3 270 top
R13  91k  [R0402]  37.4,51.9 0 top
R14  13k  [R0402]  37.4,53.1 180 top
R15  1M  [R1206S]  24.8,56.7 30 top
R16  100k  [R0603]  37.7,54.3 0 top
R17  1k  [R0402]  29.1,52 180 top
R18  27k  [R0402]  33.3,27.9 270 top
R19  9.1k  [R0402]  35.2,27.9 270 top
R20  9.1k  [R0402]  25.5,50 180 top
R21  F:5.1kP:5.6k  [R0402]  29.9,30.4 270 top
R22  9.1k  [R0402]  25.5,44.9 180 top
R23  F:7.5kP:5.1k  [R0402]  31.5,30.4 270 top
R24  0  [R0402]  26.9,48.8 0 top
R25  13k  [R0402]  25.5,46.3 0 top
R26  9.1k  [R0402]  29.6,28.2 0 top
R27  F:180kP:270k  [R0402]  33.3,32.3 0 top
R28  27k  [R0402]  31.7,27.9 270 top
R29  470  [R0402]  25.9,42.1 90 top
R30  27k  [R0402]  24.7,42.1 270 top
R31  F:180kP:270k  [R0402]  29.8,41.5 0 top
R32  27k  [R0402]  27.4,40.2 180 top
R33  0  [R0402]  35.1,37.6 270 top
R34  27k  [R0402]  27.4,39 180 top
R35  F:5.1kP:5.6k  [R0402]  36.4,37.5 270 top
R36  F:7.5kP:5.1k  [R0402]  32.3,43.3 90 top
R37  27k  [R0402]  24.7,37.1 270 top
R38  100  [R0603]  26.1,37.1 90 top
R39  F:7.5kP:5.1k  [R0402]  37.6,37.5 90 top
R40  F:5.1kP:5.6k  [R0402]  33.7,43.3 90 top
R41  F:180kP:270k  [R0402]  35.1,40.1 270 top
R42  4.7k  [R0402]  30.1,15.3 0 top
R43  4.7k  [R0402]  27.3,15.5 180 top
R44  1k  [R0402]  17.9,6.1 0 top
R45  2.2k  [R0402]  12.5,6.1 0 top
R46  3.3  [R0603]  10.1,10.1 180 top
R47  3.3  [R0603]  10.1,11.9 180 top
R48  2.2k  [R0402]  33.3,14.6 135 top
R49  2.2k  [R0402]  19.4,25.7 270 top
R50  1k  [R0402]  37.3,15.5 90 top
R51  1k  [R0402]  9.6,30.9 180 top
R52  100  [R0603]  9.6,29.7 0 top
R53  130  [R0402]  26.5,31.7 90 top
R54  120  [R0402]  27.9,31.7 270 top
R55  2.2k  [R0402]  17.4,24.1 270 top
R56  1k  [R0402]  9.6,27.6 180 top
R57  100  [R0603]  9.6,26.3 0 top
R58  100k  [R0603]  8.9,21.2 180 top
R59  100k  [R0603]  8.9,17.8 180 top
R60  100k  [R0603]  9.6,19.5 180 top
R61  100k  [R0603]  9.6,16.1 180 top
R62  2.2k  [R0402]  17.4,21.5 0 top
R63  1k  [R0402]  9.6,24.2 180 top
R64  100  [R0603]  9.6,22.9 0 top
R65  2.2k  [R0402]  19.7,108.35 90 top
R66  1k  [R0402]  16.4,103.4 90 top
R67  1M  [R1206S]  24.8,113.4 30 top
R68  100k  [R0603]  37.7,111 0 top
R69  3.3  [R0603]  10.1,66.8 180 top
R70  3.3  [R0603]  10.1,68.6 180 top
R71  4.7k  [R0402]  27.3,72.2 180 top
R72  4.7k  [R0402]  30.1,72 0 top
R73  2.2k  [R0402]  12.5,62.8 0 top
R74  1k  [R0402]  17.9,62.8 0 top
R75  1k  [R0402]  9.6,87.6 180 top
R76  1k  [R0402]  9.6,84.3 180 top
R77  1k  [R0402]  9.6,80.9 180 top
R78  2.2k  [R0402]  19.4,82.4 270 top
R79  2.2k  [R0402]  17.4,80.8 270 top
R80  2.2k  [R0402]  17.4,78.2 0 top
R81  100  [R0603]  9.6,86.4 0 top
R82  100  [R0603]  9.6,83 0 top
R83  100  [R0603]  9.6,79.6 0 top
R84  100k  [R0603]  9.6,76.2 180 top
R85  100k  [R0603]  9.6,72.8 180 top
R86  100k  [R0603]  8.9,74.5 180 top
R87  100k  [R0603]  8.9,77.9 180 top
R88  130  [R0402]  26.5,88.4 90 top
R89  120  [R0402]  27.9,88.4 270 top
R90  2.2k  [R0402]  33.3,71.3 135 top
R91  1k  [R0402]  37.3,72.2 90 top
R92  12k  [R0402]  35.2,75.3 0 top
R93  10  [R0603]  20.9,114.2 270 top
R94  10  [R0603]  17.6,113.4 0 top
R95  27k  [R0402]  24.7,98.8 270 top
R96  27k  [R0402]  24.7,93.8 270 top
R97  27k  [R0402]  27.4,96.9 180 top
R98  27k  [R0402]  27.4,95.7 180 top
R99  4.7k  [R0402]  32.1,101.9 180 top
R100  13k  [R0402]  38.4,103 270 top
R101  91k  [R0402]  34.9,101.9 180 top
R102  4.7k  [R0402]  33.8,108.7 0 top
R103  13k  [R0402]  37.4,109.8 180 top
R104  91k  [R0402]  37.4,108.6 0 top
R105  F:5.1kP:5.6k  [R0402]  29.9,87.1 270 top
R106  F:7.5kP:5.1k  [R0402]  31.5,87.1 270 top
R107  F:180kP:270k  [R0402]  33.3,89 0 top
R108  F:5.1kP:5.6k  [R0402]  36.4,94.2 270 top
R109  F:7.5kP:5.1k  [R0402]  37.6,94.2 90 top
R110  F:180kP:270k  [R0402]  35.1,96.8 270 top
R111  470  [R0402]  17.9,100.9 90 top
R112  470  [R0402]  19.5,100.9 90 top
R113  9.1k  [R0402]  35.2,84.6 270 top
R114  27k  [R0402]  33.3,84.6 270 top
R115  27k  [R0402]  31.7,84.6 270 top
R116  9.1k  [R0402]  29.6,84.9 0 top
R117  0  [R0402]  26.9,105.5 0 top
R118  0  [R0402]  35.1,94.3 270 top
R119  0  [R0402]  20.9,107.7 270 top
R120  9.1k  [R0402]  25.5,106.7 180 top
R121  13k  [R0402]  25.5,103 0 top
R122  9.1k  [R0402]  25.5,101.6 180 top
R123  470  [R0402]  25.9,98.8 90 top
R124  100  [R0603]  26.1,93.8 90 top
R125  F:5.1kP:5.6k  [R0402]  33.7,100 90 top
R126  F:180kP:270k  [R0402]  29.8,98.2 0 top
R127  F:7.5kP:5.1k  [R0402]  32.3,100 90 top
R128  1k  [R0402]  29.1,108.7 180 top
R129  2.2k  [R0402]  54.2,51.65 90 top
R130  1k  [R0402]  50.9,46.7 90 top
R131  1M  [R1206S]  59.3,56.7 30 top
R132  100k  [R0603]  72.2,54.3 0 top
R133  3.3  [R0603]  44.6,10.1 180 top
R134  3.3  [R0603]  44.6,11.9 180 top
R135  4.7k  [R0402]  61.8,15.5 180 top
R136  4.7k  [R0402]  64.6,15.3 0 top
R137  2.2k  [R0402]  47,6.1 0 top
R138  1k  [R0402]  52.4,6.1 0 top
R139  1k  [R0402]  44.1,30.9 180 top
R140  1k  [R0402]  44.1,27.6 180 top
R141  1k  [R0402]  44.1,24.2 180 top
R142  2.2k  [R0402]  53.9,25.7 270 top
R143  2.2k  [R0402]  51.9,24.1 270 top
R144  2.2k  [R0402]  51.9,21.5 0 top
R145  100  [R0603]  44.1,29.7 0 top
R146  100  [R0603]  44.1,26.3 0 top
R147  100  [R0603]  44.1,22.9 0 top
R148  100k  [R0603]  44.1,19.5 180 top
R149  100k  [R0603]  44.1,16.1 180 top
R150  100k  [R0603]  43.4,17.8 180 top
R151  100k  [R0603]  43.4,21.2 180 top
R152  130  [R0402]  61,31.7 90 top
R153  120  [R0402]  62.4,31.7 270 top
R154  2.2k  [R0402]  67.8,14.6 135 top
R155  1k  [R0402]  71.8,15.5 90 top
R156  12k  [R0402]  69.7,18.6 0 top
R157  10  [R0603]  55.4,57.5 270 top
R158  10  [R0603]  52.1,56.7 0 top
R159  27k  [R0402]  59.2,42.1 270 top
R160  27k  [R0402]  59.2,37.1 270 top
R161  27k  [R0402]  61.9,40.2 180 top
R162  27k  [R0402]  61.9,39 180 top
R163  4.7k  [R0402]  66.6,45.2 180 top
R164  13k  [R0402]  72.9,46.3 270 top
R165  91k  [R0402]  69.4,45.2 180 top
R166  4.7k  [R0402]  68.3,52 0 top
R167  13k  [R0402]  71.9,53.1 180 top
R168  91k  [R0402]  71.9,51.9 0 top
R169  F:5.1kP:5.6k  [R0402]  64.4,30.4 270 top
R170  F:7.5kP:5.1k  [R0402]  66,30.4 270 top
R171  F:180kP:270k  [R0402]  67.8,32.3 0 top
R172  F:5.1kP:5.6k  [R0402]  70.9,37.5 270 top
R173  F:7.5kP:5.1k  [R0402]  72.1,37.5 90 top
R174  F:180kP:270k  [R0402]  69.6,40.1 270 top
R175  470  [R0402]  52.4,44.2 90 top
R176  470  [R0402]  54,44.2 90 top
R177  9.1k  [R0402]  69.7,27.9 270 top
R178  27k  [R0402]  67.8,27.9 270 top
R179  27k  [R0402]  66.2,27.9 270 top
R180  9.1k  [R0402]  64.1,28.2 0 top
R181  0  [R0402]  61.4,48.8 0 top
R182  0  [R0402]  69.6,37.6 270 top
R183  0  [R0402]  55.4,51 270 top
R184  9.1k  [R0402]  60,50 180 top
R185  13k  [R0402]  60,46.3 0 top
R186  9.1k  [R0402]  60,44.9 180 top
R187  470  [R0402]  60.4,42.1 90 top
R188  100  [R0603]  60.6,37.1 90 top
R189  F:5.1kP:5.6k  [R0402]  68.2,43.3 90 top
R190  F:180kP:270k  [R0402]  64.3,41.5 0 top
R191  F:7.5kP:5.1k  [R0402]  66.8,43.3 90 top
R192  1k  [R0402]  63.6,52 180 top
R193  2.2k  [R0402]  54.2,108.35 90 top
R194  1k  [R0402]  50.9,103.4 90 top
R195  1M  [R1206S]  59.3,113.4 30 top
R196  100k  [R0603]  72.2,111 0 top
R197  3.3  [R0603]  44.6,66.8 180 top
R198  3.3  [R0603]  44.6,68.6 180 top
R199  4.7k  [R0402]  61.8,72.2 180 top
R200  4.7k  [R0402]  64.6,72 0 top
R201  2.2k  [R0402]  47,62.8 0 top
R202  1k  [R0402]  52.4,62.8 0 top
R203  1k  [R0402]  44.1,87.6 180 top
R204  1k  [R0402]  44.1,84.3 180 top
R205  1k  [R0402]  44.1,80.9 180 top
R206  2.2k  [R0402]  53.9,82.4 270 top
R207  2.2k  [R0402]  51.9,80.8 270 top
R208  2.2k  [R0402]  51.9,78.2 0 top
R209  100  [R0603]  44.1,86.4 0 top
R210  100  [R0603]  44.1,83 0 top
R211  100  [R0603]  44.1,79.6 0 top
R212  100k  [R0603]  44.1,76.2 180 top
R213  100k  [R0603]  44.1,72.8 180 top
R214  100k  [R0603]  43.4,74.5 180 top
R215  100k  [R0603]  43.4,77.9 180 top
R216  130  [R0402]  61,88.4 90 top
R217  120  [R0402]  62.4,88.4 270 top
R218  2.2k  [R0402]  67.8,71.3 135 top
R219  1k  [R0402]  71.8,72.2 90 top
R220  12k  [R0402]  69.7,75.3 0 top
R221  10  [R0603]  55.4,114.2 270 top
R222  10  [R0603]  52.1,113.4 0 top
R223  27k  [R0402]  59.2,98.8 270 top
R224  27k  [R0402]  59.2,93.8 270 top
R225  27k  [R0402]  61.9,96.9 180 top
R226  27k  [R0402]  61.9,95.7 180 top
R227  4.7k  [R0402]  66.6,101.9 180 top
R228  13k  [R0402]  72.9,103 270 top
R229  91k  [R0402]  69.4,101.9 180 top
R230  4.7k  [R0402]  68.3,108.7 0 top
R231  13k  [R0402]  71.9,109.8 180 top
R232  91k  [R0402]  71.9,108.6 0 top
R233  F:5.1kP:5.6k  [R0402]  64.4,87.1 270 top
R234  F:7.5kP:5.1k  [R0402]  66,87.1 270 top
R235  F:180kP:270k  [R0402]  67.8,89 0 top
R236  F:5.1kP:5.6k  [R0402]  70.9,94.2 270 top
R237  F:7.5kP:5.1k  [R0402]  72.1,94.2 90 top
R238  F:180kP:270k  [R0402]  69.6,96.8 270 top
R239  470  [R0402]  52.4,100.9 90 top
R240  470  [R0402]  54,100.9 90 top
R241  9.1k  [R0402]  69.7,84.6 270 top
R242  27k  [R0402]  67.8,84.6 270 top
R243  27k  [R0402]  66.2,84.6 270 top
R244  9.1k  [R0402]  64.1,84.9 0 top
R245  0  [R0402]  61.4,105.5 0 top
R246  0  [R0402]  69.6,94.3 270 top
R247  0  [R0402]  55.4,107.7 270 top
R248  9.1k  [R0402]  60,106.7 180 top
R249  13k  [R0402]  60,103 0 top
R250  9.1k  [R0402]  60,101.6 180 top
R251  470  [R0402]  60.4,98.8 90 top
R252  100  [R0603]  60.6,93.8 90 top
R253  F:5.1kP:5.6k  [R0402]  68.2,100 90 top
R254  F:180kP:270k  [R0402]  64.3,98.2 0 top
R255  F:7.5kP:5.1k  [R0402]  66.8,100 90 top
R256  1k  [R0402]  63.6,108.7 180 top
R257  2.2k  [R0402]  88.7,51.65 90 top
R258  1k  [R0402]  85.4,46.7 90 top
R259  1M  [R1206S]  93.8,56.7 30 top
R260  100k  [R0603]  106.7,54.3 0 top
R261  3.3  [R0603]  79.1,10.1 180 top
R262  3.3  [R0603]  79.1,11.9 180 top
R263  4.7k  [R0402]  96.3,15.5 180 top
R264  4.7k  [R0402]  99.1,15.3 0 top
R265  2.2k  [R0402]  81.5,6.1 0 top
R266  1k  [R0402]  86.9,6.1 0 top
R267  1k  [R0402]  78.6,30.9 180 top
R268  1k  [R0402]  78.6,27.6 180 top
R269  1k  [R0402]  78.6,24.2 180 top
R270  2.2k  [R0402]  88.4,25.7 270 top
R271  2.2k  [R0402]  86.4,24.1 270 top
R272  2.2k  [R0402]  86.4,21.5 0 top
R273  100  [R0603]  78.6,29.7 0 top
R274  100  [R0603]  78.6,26.3 0 top
R275  100  [R0603]  78.6,22.9 0 top
R276  100k  [R0603]  78.6,19.5 180 top
R277  100k  [R0603]  78.6,16.1 180 top
R278  100k  [R0603]  77.9,17.8 180 top
R279  100k  [R0603]  77.9,21.2 180 top
R280  130  [R0402]  95.5,31.7 90 top
R281  120  [R0402]  96.9,31.7 270 top
R282  2.2k  [R0402]  102.3,14.6 135 top
R283  1k  [R0402]  106.3,15.5 90 top
R284  12k  [R0402]  104.2,18.6 0 top
R285  10  [R0603]  89.9,57.5 270 top
R286  10  [R0603]  86.6,56.7 0 top
R287  27k  [R0402]  93.7,42.1 270 top
R288  27k  [R0402]  93.7,37.1 270 top
R289  27k  [R0402]  96.4,40.2 180 top
R290  27k  [R0402]  96.4,39 180 top
R291  4.7k  [R0402]  101.1,45.2 180 top
R292  13k  [R0402]  107.4,46.3 270 top
R293  91k  [R0402]  103.9,45.2 180 top
R294  4.7k  [R0402]  102.8,52 0 top
R295  13k  [R0402]  106.4,53.1 180 top
R296  91k  [R0402]  106.4,51.9 0 top
R297  F:5.1kP:5.6k  [R0402]  98.9,30.4 270 top
R298  F:7.5kP:5.1k  [R0402]  100.5,30.4 270 top
R299  F:180kP:270k  [R0402]  102.3,32.3 0 top
R300  F:5.1kP:5.6k  [R0402]  105.4,37.5 270 top
R301  F:7.5kP:5.1k  [R0402]  106.6,37.5 90 top
R302  F:180kP:270k  [R0402]  104.1,40.1 270 top
R303  470  [R0402]  86.9,44.2 90 top
R304  470  [R0402]  88.5,44.2 90 top
R305  9.1k  [R0402]  104.2,27.9 270 top
R306  27k  [R0402]  102.3,27.9 270 top
R307  27k  [R0402]  100.7,27.9 270 top
R308  9.1k  [R0402]  98.6,28.2 0 top
R309  0  [R0402]  95.9,48.8 0 top
R310  0  [R0402]  104.1,37.6 270 top
R311  0  [R0402]  89.9,51 270 top
R312  9.1k  [R0402]  94.5,50 180 top
R313  13k  [R0402]  94.5,46.3 0 top
R314  9.1k  [R0402]  94.5,44.9 180 top
R315  470  [R0402]  94.9,42.1 90 top
R316  100  [R0603]  95.1,37.1 90 top
R317  F:5.1kP:5.6k  [R0402]  102.7,43.3 90 top
R318  F:180kP:270k  [R0402]  98.8,41.5 0 top
R319  F:7.5kP:5.1k  [R0402]  101.3,43.3 90 top
R320  1k  [R0402]  98.1,52 180 top
R321  2.2k  [R0402]  88.7,108.35 90 top
R322  1k  [R0402]  85.4,103.4 90 top
R323  1M  [R1206S]  93.8,113.4 30 top
R324  100k  [R0603]  106.7,111 0 top
R325  3.3  [R0603]  79.1,66.8 180 top
R326  3.3  [R0603]  79.1,68.6 180 top
R327  4.7k  [R0402]  96.3,72.2 180 top
R328  4.7k  [R0402]  99.1,72 0 top
R329  2.2k  [R0402]  81.5,62.8 0 top
R330  1k  [R0402]  86.9,62.8 0 top
R331  1k  [R0402]  78.6,87.6 180 top
R332  1k  [R0402]  78.6,84.3 180 top
R333  1k  [R0402]  78.6,80.9 180 top
R334  2.2k  [R0402]  88.4,82.4 270 top
R335  2.2k  [R0402]  86.4,80.8 270 top
R336  2.2k  [R0402]  86.4,78.2 0 top
R337  100  [R0603]  78.6,86.4 0 top
R338  100  [R0603]  78.6,83 0 top
R339  100  [R0603]  78.6,79.6 0 top
R340  100k  [R0603]  78.6,76.2 180 top
R341  100k  [R0603]  78.6,72.8 180 top
R342  100k  [R0603]  77.9,74.5 180 top
R343  100k  [R0603]  77.9,77.9 180 top
R344  130  [R0402]  95.5,88.4 90 top
R345  120  [R0402]  96.9,88.4 270 top
R346  2.2k  [R0402]  102.3,71.3 135 top
R347  1k  [R0402]  106.3,72.2 90 top
R348  12k  [R0402]  104.2,75.3 0 top
R349  10  [R0603]  89.9,114.2 270 top
R350  10  [R0603]  86.6,113.4 0 top
R351  27k  [R0402]  93.7,98.8 270 top
R352  27k  [R0402]  93.7,93.8 270 top
R353  27k  [R0402]  96.4,96.9 180 top
R354  27k  [R0402]  96.4,95.7 180 top
R355  4.7k  [R0402]  101.1,101.9 180 top
R356  13k  [R0402]  107.4,103 270 top
R357  91k  [R0402]  103.9,101.9 180 top
R358  4.7k  [R0402]  102.8,108.7 0 top
R359  13k  [R0402]  106.4,109.8 180 top
R360  91k  [R0402]  106.4,108.6 0 top
R361  F:5.1kP:5.6k  [R0402]  98.9,87.1 270 top
R362  F:7.5kP:5.1k  [R0402]  100.5,87.1 270 top
R363  F:180kP:270k  [R0402]  102.3,89 0 top
R364  F:5.1kP:5.6k  [R0402]  105.4,94.2 270 top
R365  F:7.5kP:5.1k  [R0402]  106.6,94.2 90 top
R366  F:180kP:270k  [R0402]  104.1,96.8 270 top
R367  470  [R0402]  86.9,100.9 90 top
R368  470  [R0402]  88.5,100.9 90 top
R369  9.1k  [R0402]  104.2,84.6 270 top
R370  27k  [R0402]  102.3,84.6 270 top
R371  27k  [R0402]  100.7,84.6 270 top
R372  9.1k  [R0402]  98.6,84.9 0 top
R373  0  [R0402]  95.9,105.5 0 top
R374  0  [R0402]  104.1,94.3 270 top
R375  0  [R0402]  89.9,107.7 270 top
R376  9.1k  [R0402]  94.5,106.7 180 top
R377  13k  [R0402]  94.5,103 0 top
R378  9.1k  [R0402]  94.5,101.6 180 top
R379  470  [R0402]  94.9,98.8 90 top
R380  100  [R0603]  95.1,93.8 90 top
R381  F:5.1kP:5.6k  [R0402]  102.7,100 90 top
R382  F:180kP:270k  [R0402]  98.8,98.2 0 top
R383  F:7.5kP:5.1k  [R0402]  101.3,100 90 top
R384  1k  [R0402]  98.1,108.7 180 top
SWD  [1X05]  37.9,25.8 270 top
SWD1  [1X05]  37.9,82.5 270 top
SWD2  [1X05]  72.4,25.8 270 top
SWD3  [1X05]  72.4,82.5 270 top
SWD4  [1X05]  106.9,25.8 270 top
SWD5  [1X05]  106.9,82.5 270 top
U1  TLV71333PDBVR  [SOT-23-5]  20.1,39.4 270 top
U2  NCP1117LPST50T3G  [SOT223-3L]  13.4,39.4 270 top
U3  SAMD20E14A-AUT  [TQFP32]  27.5,21.6 180 top
U4  MFRC52202HN1  [QFN32]  24.2,10.8 270 top
U5  NCP1117LPST50T3G  [SOT223-3L]  13.4,96.1 270 top
U6  MFRC52202HN1  [QFN32]  24.2,67.5 270 top
U7  SAMD20E14A-AUT  [TQFP32]  27.5,78.3 180 top
U8  TLV71333PDBVR  [SOT-23-5]  20.1,96.1 270 top
U9  NCP1117LPST50T3G  [SOT223-3L]  47.9,39.4 270 top
U10  MFRC52202HN1  [QFN32]  58.7,10.8 270 top
U11  SAMD20E14A-AUT  [TQFP32]  62,21.6 180 top
U12  TLV71333PDBVR  [SOT-23-5]  54.6,39.4 270 top
U13  NCP1117LPST50T3G  [SOT223-3L]  47.9,96.1 270 top
U14  MFRC52202HN1  [QFN32]  58.7,67.5 270 top
U15  SAMD20E14A-AUT  [TQFP32]  62,78.3 180 top
U16  TLV71333PDBVR  [SOT-23-5]  54.6,96.1 270 top
U17  NCP1117LPST50T3G  [SOT223-3L]  82.4,39.4 270 top
U18  MFRC52202HN1  [QFN32]  93.2,10.8 270 top
U19  SAMD20E14A-AUT  [TQFP32]  96.5,21.6 180 top
U20  TLV71333PDBVR  [SOT-23-5]  89.1,39.4 270 top
U21  NCP1117LPST50T3G  [SOT223-3L]  82.4,96.1 270 top
U22  MFRC52202HN1  [QFN32]  93.2,67.5 270 top
U23  SAMD20E14A-AUT  [TQFP32]  96.5,78.3 180 top
U24  TLV71333PDBVR  [SOT-23-5]  89.1,96.1 270 top
VCC  VCC  [HOLE]  7.1,35.3 0 top
VCC1  VCC  [HOLE]  7.1,92 0 top
VCC2  VCC  [HOLE]  41.6,35.3 0 top
VCC3  VCC  [HOLE]  41.6,92 0 top
VCC4  VCC  [HOLE]  76.1,35.3 0 top
VCC5  VCC  [HOLE]  76.1,92 0 top
X1  ANTENA  [22-23-2021]  27.5,60.1 0 top
X2  MIFARE  [ANTENNA]  7,12.4 90 top
X3  ANTENA  [22-23-2021]  27.5,116.8 0 top
X4  MIFARE  [ANTENNA]  7,69.1 90 top
X5  ANTENA  [22-23-2021]  62,60.1 0 top
X6  MIFARE  [ANTENNA]  41.5,12.4 90 top
X7  ANTENA  [22-23-2021]  62,116.8 0 top
X8  MIFARE  [ANTENNA]  41.5,69.1 90 top
X9  ANTENA  [22-23-2021]  96.5,60.1 0 top
X10  MIFARE  [ANTENNA]  76,12.4 90 top
X11  ANTENA  [22-23-2021]  96.5,116.8 0 top
X12  MIFARE  [ANTENNA]  76,69.1 90 top